# Altium PCB PWR MOD 1.0 B.PcbDoc
Units mm, origin at the board's own origin, x right, y up, seen from the top; angles counter-clockwise.
Board outline 72 x 31.25 mm, 2 copper layers (Top Layer, Bottom Layer), stack 1.621 mm thick; 47 components, 27 nets, 137 pads, 152 vias.
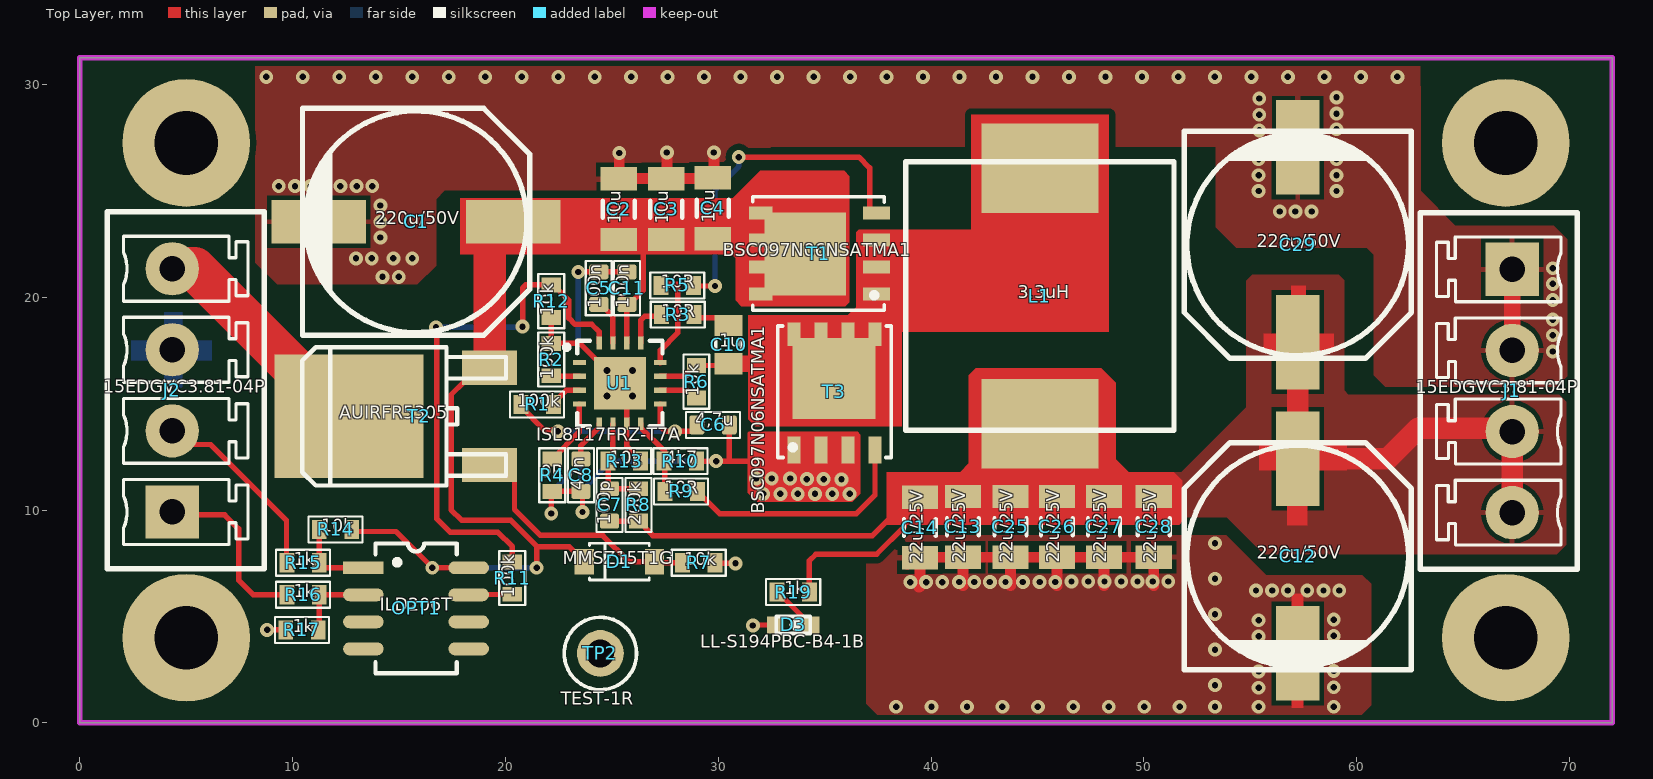
[diagram p0: Top Layer view]
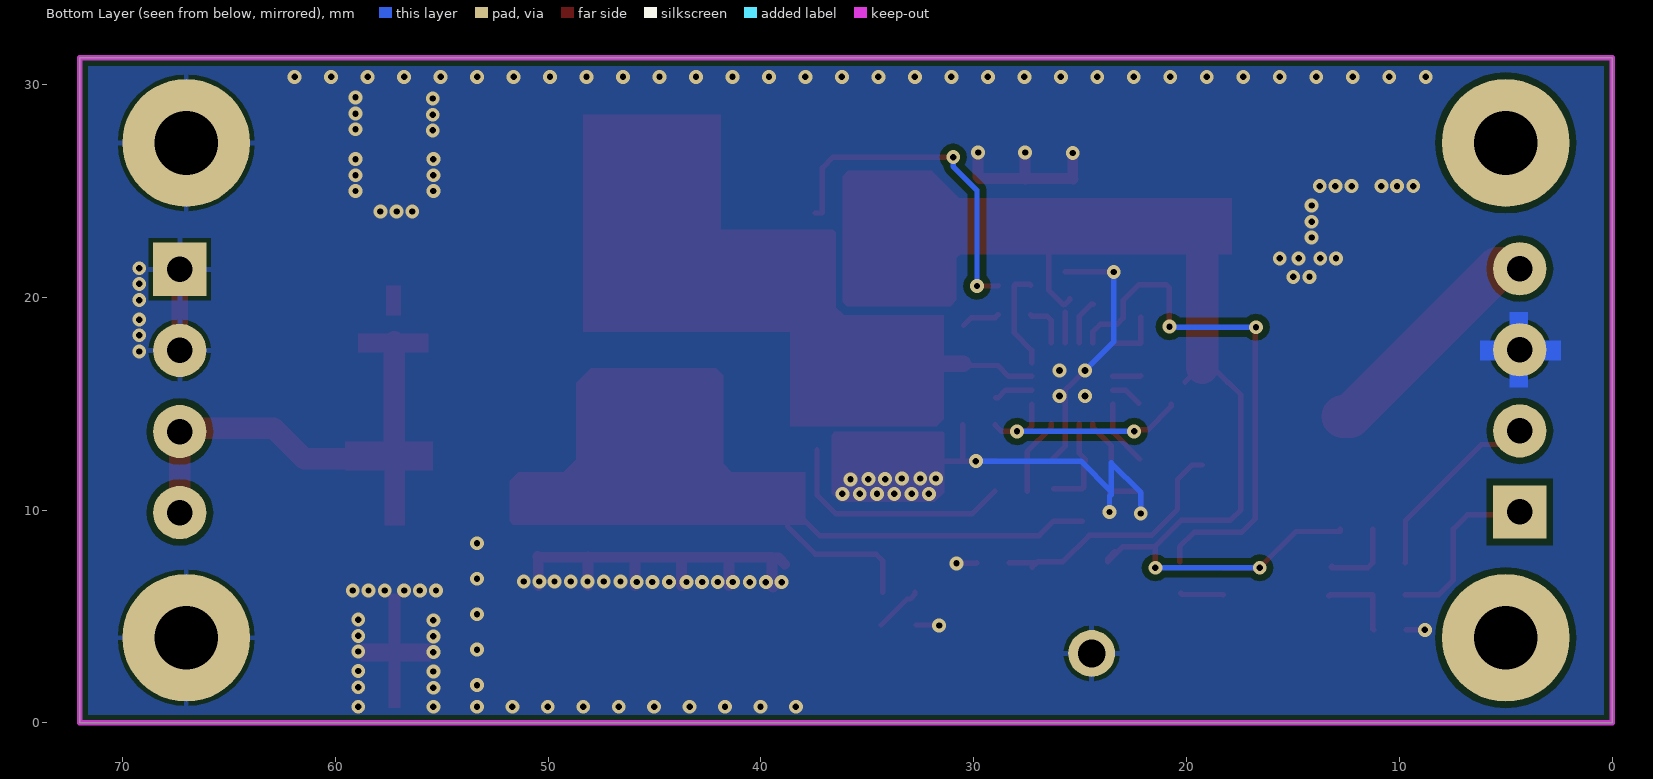
[diagram p1: Bottom Layer view, seen from below]
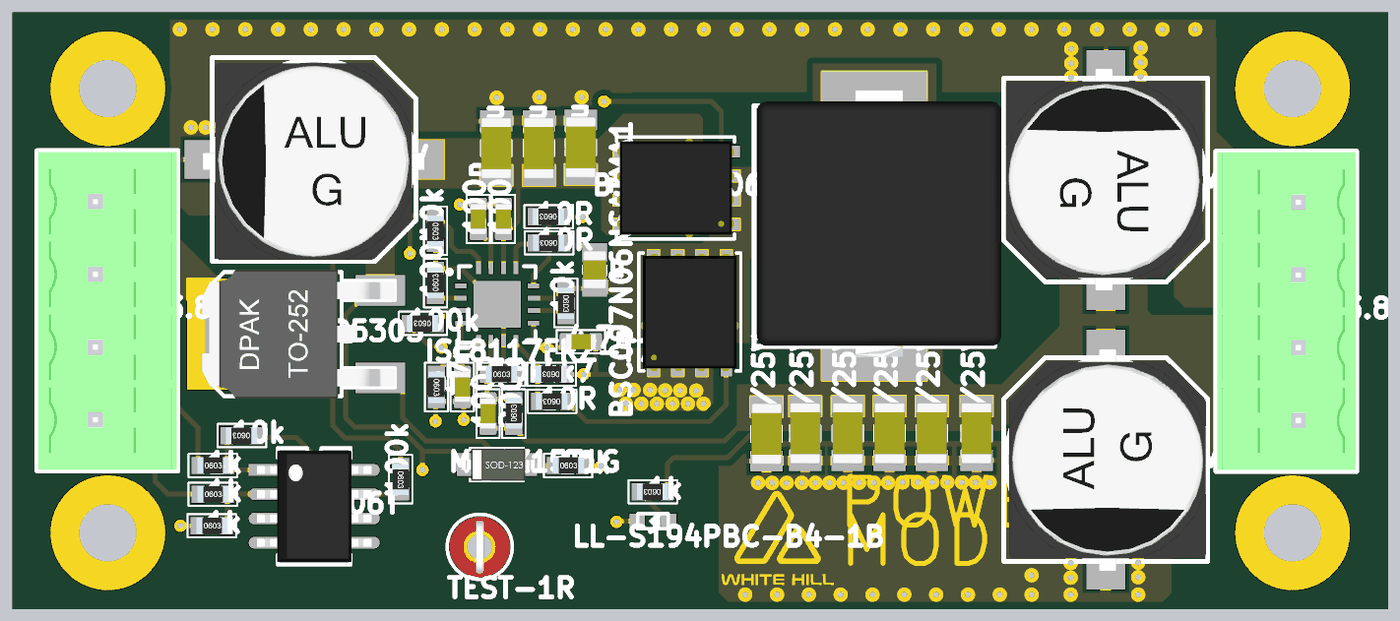
[diagram p2: 3D render of the assembled board from above, using the file's embedded part models]

## Layer stack, top to bottom
Top Solder: solder mask 0.0102, Solder Resist, Dk 3.5
Top Layer: signal copper 0.0356
Dielectric1: core 1.55, FR-4, Dk 4.2
Bottom Layer: signal copper 0.0356
Bottom Solder: solder mask 0.0102, Solder Resist, Dk 3.5

## Board outline
0,0 0,31.25 72,31.25 72,0

## Design rules (kind name [scope] priority, off if disabled: settings)
Clearance Clearance_1 [(OnLayer('Keep-Out Layer'))] p1: gap=0.254 ignorepadtopadclearanceinfootprint=FALSE except(0: Arc-Hole Track-Hole SMDPad-Hole THPad-Hole Via-Hole Fill-Hole Poly-Hole Region-Hole Text-Hole)
Clearance Track [istrack vs istrack] p2: gap=0.152 ignorepadtopadclearanceinfootprint=FALSE except(0: Arc-Hole Track-Hole SMDPad-Hole THPad-Hole Via-Hole Fill-Hole Poly-Hole Region-Hole Text-Hole)
Clearance poly [inpoly] p3: gap=0.305 ignorepadtopadclearanceinfootprint=FALSE
Clearance [All] p4: gap=0.178 ignorepadtopadclearanceinfootprint=FALSE except(0: Arc-Hole Track-Hole SMDPad-Hole THPad-Hole Via-Hole Fill-Hole Poly-Hole Region-Hole Text-Hole)
ComponentClearance ComponentClearance_2 [HasFootprint('CR123')] p1: gap=0 collisioncheckmode=3 verticalgap=0 showdistances=TRUE
ComponentClearance ComponentClearance_1 [HasFootprint('ANT1')] p2: gap=0 collisioncheckmode=3 verticalgap=0 showdistances=TRUE
ComponentClearance [All] p3: gap=0 collisioncheckmode=3 verticalgap=0 showdistances=FALSE
HoleSize [All] p1: absolutevalues=TRUE maxlimit=25.4 minlimit=0.254 maxpercent=80.000 minpercent=20.000
PolygonConnect CR123 [HasFootprint('CR123')] p1: connectstyle=Relief reliefconductorwidth=0.508 reliefentries=4 polygonreliefangle="90 Angle" airgapwidth=0.254
PolygonConnect coax [HasFootprint('COAXIAL-SWF')] p2: connectstyle=Direct reliefconductorwidth=0.254 reliefentries=4 polygonreliefangle="90 Angle" airgapwidth=0.254
PolygonConnect PolygonConnect_1 [isvia] p3: connectstyle=Direct reliefconductorwidth=0.254 reliefentries=4 polygonreliefangle="90 Angle" airgapwidth=0.254
PolygonConnect [All] p4: connectstyle=Relief reliefconductorwidth=0.254 reliefentries=4 polygonreliefangle="90 Angle" airgapwidth=0.203
RoutingVias [All] p1: holewidth=0.3 width=0.65 viastyle="Through Hole" minholewidth=0.3 minwidth=0.65 maxholewidth=0.3 maxwidth=0.65
SolderMaskExpansion SolderMaskExpansion_1 [isvia] p1: expansion=-2.54
SolderMaskExpansion [All] p2: expansion=0.051
Width [All] p1: maxlimit=5.08 minlimit=0.152 preferedwidth=0.254 minimp=50.000000 maximp=50.000000 favimp=50.000000
28 further rules are at their usual default settings.

## Components (designator, comment, footprint, x,y, rotation, side; value= is the part's Value field where it differs from the comment)
C1 "220u/50V" ALU-G 15.799,23.546 r270 top
C2 "10u" C1206 25.324,24.137 r90 top
C3 "10u" C1206 27.554,24.137 r90 top
C4 "10u" C1206 29.743,24.183 r90 top
C5 "100n" C0603 24.384,20.426 r90 top
C6 "4,7u" C0603 29.755,14 r0 top
C7 "100p" C0603 24.892,10.241 r270 top
C8 "47n" C0603 23.546,11.638 r270 top
C10 "1u" C0805-10 30.48,17.77 r270 top
C11 "100n" C0603 25.705,20.426 r270 top
C12 "220u/50V" ALU-G 57.226,7.836 r0 top
C13 "22u/25V" C1206 41.49,9.211 r270 top
C14 "22u/25V" C1206 39.472,9.18 r270 top
C25 "22u/25V" C1206 43.725,9.211 r270 top
C26 "22u/25V" C1206 45.91,9.211 r270 top
C27 "22u/25V" C1206 48.12,9.211 r270 top
C28 "22u/25V" C1206 50.456,9.211 r270 top
C29 "220u/50V" ALU-G 57.226,22.466 r180 top
D1 "MMSZ15T1G" SOD123 25.349,7.574 r0 top
D3 "LL-S194PBC-B4-1B" LED0603B 33.519,4.602 r180 top
J1 "15EDGVC3.81-04P" MCV1,5/4-G3,81 67.301,21.311 r0 top
J2 "15EDGVC3.81-04P" MCV1,5/4-G3,81 4.343,9.911 r180 top
L1 "3.3uH" HPI1260 45.11,20.056 r90 top
OPT1 "ILD206T" SO-8-OPT 15.799,5.385 r0 top
R1 "100k" R0603 21.487,14.965 r180 top
R2 "100k" R0603 22.149,17.073 r90 top
R3 "10R" R0603 28.092,19.181 r180 top
R4 "0R" R0603 22.2,11.638 r270 top
R5 "10R" R0603 28.071,20.553 r180 top
R6 "10k" R0603 28.968,16.032 r270 top
R7 "10k" R0603 29.083,7.523 r0 top
R8 "200k" R0603 26.245,10.241 r90 top
R9 "10R" R0603 28.252,10.876 r180 top
R10 "4k7" R0603 28.219,12.298 r180 top
R11 "100k" R0603 20.32,6.807 r270 top
R12 "10k" R0603 22.149,19.816 r270 top
R13 "10k" R0603 25.578,12.298 r0 top
R14 "10k" R0603 12.014,9.093 r180 top
R15 "1k" R0603 10.49,7.523 r0 top
R16 "1k" R0603 10.49,6.02 r0 top
R17 "1k" R0603 10.439,4.369 r0 top
R19 "1k" R0603 33.519,6.147 r180 top
T1 "BSC097N06NSATMA1" "PowerPAK SO-8" 34.722,22.052 r180 top
T2 "AUIRFR5305" DPAK 15.951,14.402 r180 top
T3 "BSC097N06NSATMA1" "PowerPAK SO-8" 35.458,15.549 r90 top
TP2 "TEST-1R" TP-O 24.46,3.264 r0 top
U1 "ISL8117FRZ-T7A" QFN-16-0.5 25.375,15.956 r0 top

## Footprints (in the part's own frame and the unit in brackets; to place one, negate y for a bottom-side part, rotate by r counter-clockwise, add the part's x,y. Pads: shape width x height; smd on the part's side, far side on the other; paste and mask are expansions set on the pad)
ALU-G [mil]
  rect 80x175 smd: 1(0,180) 2(0,-180)
  silkscreen extent -210,-210 210,210, body extent -199,-229 207,227, height 402
C0603 [mm] "Chip Capacitor, Body 1.6x0.8mm, IPC High Density"
  rrect30% 0.7x0.9 smd: 1(-0.762,0) 2(0.762,0)
  silkscreen extent -1.27,-0.61 1.27,0.61, body extent -0.8,-0.4 0.8,0.4, height 0.5
C0805-10 [mm]
  rect 1x1.3 smd: 1(-0.9,0) 2(0.9,0)
  silkscreen extent -0.2,-0.6 0.2,0.6, body extent -1,-0.63 1,0.63, height 1
C1206 [mm]
  rect 1.1x1.7 smd: 1(-1.425,0) 2(1.425,0)
  silkscreen extent -0.4,-0.75 0.4,0.75, body extent -1.6,-0.8 1.6,0.8, height 1
DPAK [mm]
  rect 2.6x1.6 smd: 1(-3.302,2.286) 3(-3.302,-2.286)
  rect 7x5.8 smd paste-3.048: 2(3.302,0)
  silkscreen extent -4.07,-3.25 5.5,3.25, body extent -4.08,-3.37 6.02,3.37, height 2.41
HPI1260 [mm] "SMT Power Inductor"
  rect 4.2x5.5 smd: 1(6,0) 2(-6,0)
  silkscreen extent -6.3,-6.3 6.3,6.3, body extent -6.87,-6.65 7.13,6.15, height 5.01
LED0603B [mm]
  rect 0.8x0.8 smd mask+0.051: A(-0.825,0) K(0.825,0)
  silkscreen extent -0.8,-0.4 0.8,0.4, body extent -0.8,-0.4 0.8,0.4, height 0.65
MCV1,5/4-G3,81 [mm]
  rect 2.5x2.5 hole 1.2: 1(0,0)
  round 2.5 hole 1.2: 2(0,-3.81) 3(0,-7.62) 4(0,-11.43)
  silkscreen extent -4.32,-14.1 3.05,2.67, body extent -4.25,-14.03 3,2.6, height 9.3
"PowerPAK SO-8" [mm]
  rect 3.81x3.91 smd: D(0.635,0.025)
  rect 1.1x0.61 smd: D(2.718,1.905) D(2.718,-0.635) D(2.718,0.635) D(2.718,-1.905)
  rect 1.27x0.61 smd: G(-2.718,-1.905) S(-2.718,1.905) S(-2.718,-0.635) S(-2.718,0.635)
  silkscreen extent -3.07,-2.67 3.1,2.67, body extent -3.07,-2.57 3.08,2.58, height 1.04
QFN-16-0.5 [mm] "QFN, 16-Leads, Body"
  rect 0.6x0.25 smd: 1(-1.9,0.975) 2(-1.9,0.325) 3(-1.9,-0.325) 4(-1.9,-0.975) 9(1.9,-0.975) 10(1.9,-0.325) 11(1.9,0.325) 12(1.9,0.975)
  rect 0.25x0.6 smd: 5(-0.975,-1.9) 6(-0.325,-1.9) 7(0.325,-1.9) 8(0.975,-1.9) 13(0.975,1.9) 14(0.325,1.9) 15(-0.325,1.9) 16(-0.975,1.9)
  rect 2.45x2.45 smd: 17(0,0)
  silkscreen extent -2.6,-2 2,2, body extent -2,-2 2,2, height 0.8
R0603 [mm] "Chip Resistor, Body 1.6x0.8mm, IPC High Density"
  rect 0.7x0.9 smd: 1(-0.762,0) 2(0.762,0)
  silkscreen extent -1.27,-0.61 1.27,0.61, body extent -0.8,-0.42 0.84,0.43, height 0.46
SO-8-OPT [mm]
  rect 1.905x0.61 smd: 1(-2.475,1.905)
  oval 1.905x0.61 smd: 2(-2.475,0.635) 3(-2.475,-0.635) 4(-2.475,-1.905) 5(2.475,-1.905) 6(2.475,-0.635) 7(2.475,0.635) 8(2.475,1.905)
  silkscreen extent -1.91,-3.05 1.91,3.05, body extent -3,-2.92 3,2.92, height 3.48
SOD123 [mm]
  rect 0.9x1.2 smd: 1(1.65,0) 2(-1.65,0)
  silkscreen extent -1.4,-0.86 1.4,0.86, body extent -1.85,-0.86 2,0.84, height 1.46
TP-O [mm]
  round 2.2 hole 1.3 paste-2.54: 1(0,0)
  silkscreen extent -1.7,-1.7 1.7,1.7, body extent -1.59,-1.59 1.59,1.59, height 8.13

## Part data
C1 C12 C29: library part CAP-EL, "Capacitor: electrolytic; low impedance; 220uF; 50VDC; Case: G", Manufacturer=Panasonic, Part Number=EEEFP1H221AP, ComponentLink1Description=Datasheet, ComponentLink1URL=D:\Datasheets\PANASONIC_FP.pdf, ComponentLink2Description=Dostawca, ComponentLink2URL=http://www.tme.eu/pl/katalog/?idp=1&search=EEEFP1H221AP, Supplier=TME, Supplier Code=EEEFP1H221AP
C2 C3 C4: library part C-028, "Capacitor: ceramic; 10uF; 50V; X7R; ±10%; SMD; 1206", Manufacturer=Samnsung, Part Number=CL31A106KBHNNNE, ComponentLink1Description=Datasheet, ComponentLink1URL=D:\Datasheets\.pdf, ComponentLink2Description=Dostawca, ComponentLink2URL=http://www.tme.eu/pl/katalog/?idp=1&search=CL31A106KBHNNNE, Indeks=C-0028, Supplier=TME, Supplier Code=CL31A106KBHNNNE
C5 C11: library part C-013, "Capacitor: ceramic; 100nF; 50V; X7R; ±10%; SMD; 0603; Series: GRM", Manufacturer=Murata, Part Number=GRM188R71H104KA93D, ComponentLink1Description=Datasheet, ComponentLink1URL=D:\Datasheets\.pdf, ComponentLink2Description=Dostawca, ComponentLink2URL=http://www.tme.eu/pl/katalog/?idp=1&search=GRM188R71H104KA93D, Indeks=C-0013, Supplier=TME, Supplier Code=GRM188R71H104KA93D
C6: library part C-031, "Capacitor: ceramic;4,7uF ; 50V; X7R; ±5%; SMD; 0603", Manufacturer=Samsung, Part Number=0603X475K100CT, ComponentLink1Description=Datasheet, ComponentLink1URL=D:\Datasheets\.pdf, ComponentLink2Description=Dostawca, ComponentLink2URL=https://www.tme.eu/pl/katalog/?search=0603X475K100CT, Indeks=C-031, Supplier=TME, Supplier Code=0603X475K100CT
C7: library part C-005, "Capacitor: ceramic; MLCC; 100pF; 50V; C0G; ±1%; SMD; 0603", Manufacturer=Vishay, Part Number=VJ0603A101FXACW1BC, ComponentLink1Description=Datasheet, ComponentLink1URL=D:\Datasheets\.pdf, ComponentLink2Description=Dostawca, ComponentLink2URL=http://www.tme.eu/pl/katalog/?idp=1&search=VJ0603A101FXACW1BC, Indeks=C-005, Supplier=TME, Supplier Code=VJ0603A101FXACW1BC
C8: library part C-012, "Capacitor: ceramic; MLCC; 47nF; 50V; X7R; ±10%; SMD; 0603", Manufacturer=Kemet, Part Number=C0603C473K5RACTU, ComponentLink1Description=Datasheet, ComponentLink1URL=D:\Datasheets\.pdf, ComponentLink2Description=Dostawca, ComponentLink2URL=http://www.tme.eu/pl/katalog/?idp=1&search=C0603C473K5RAC, Indeks=C-0012, Supplier=TME, Supplier Code=C0603C473K5RAC
C10: library part C-017, "Capacitor: ceramic; MLCC; 1uF; 50V; X7R; SMD; 0805", Manufacturer=Samsung, Part Number=CL21B105KBFNNNG, ComponentLink1Description=Datasheet, ComponentLink1URL=D:\Datasheets\.pdf, ComponentLink2Description=Dostawca, ComponentLink2URL=http://www.tme.eu/pl/katalog/?idp=1&search=CL21F105ZBFNNNE, Indeks=C-0017, Supplier=TME, Supplier Code=CL21B105KBFNNNG
C13 C14 C25 C26 C27 C28: library part C-029, "Capacitor: ceramic; 22uF; 25V; X7R; ±10%; SMD; 1206", Manufacturer=Murata, Part Number=GRM31CR61E226KE15L, ComponentLink1Description=Datasheet, ComponentLink1URL=D:\Datasheets\.pdf, ComponentLink2Description=Dostawca, ComponentLink2URL=http://www.tme.eu/pl/katalog/?idp=1&search=GRM31CR61E226KE15L, Indeks=C-0029, Supplier=TME, Supplier Code=GRM31CR61E226KE15L
D1: library part D_ZEN, "Dioda: Zenera; 0,5W; 18V; SMD", Manufacturer="ON Semi", ComponentLink1Description=Datasheet, ComponentLink1URL=D:\Datasheets\MMSZxxxT1G.pdf, ComponentLink2Description=Dostawca, ComponentLink2URL=http://www.tme.eu/pl/katalog/?idp=1&search=MMSZ15T1G, Part Number=MMSZ15T1G, Supplier=TME, Supplier Code=MMSZ15T1G
D3: library part LED_1, "LED; SMD; 0603; blue; 20-40mcd; 1.6x0.8x0.4mm; 130°; 2.8÷3.8V; 20mA", Manufacturer=LuckyLight, ComponentLink1Description=Datasheet, ComponentLink1URL=D:\Datasheets\.pdf, ComponentLink2Description=Dostawca, Part Number=LL-S194PBC-B4-1B, Supplier=TME, Supplier Code=LL-S194PBC-B4-1B
J1 J2: library part CON4, "Terminal block; 3.81mm; ways: 4; straight; socket; male", Manufacturer=Degson, Part Number=15EDGVC-3.81-04P-14-00A(H), ComponentLink1Description=Datasheet, ComponentLink1URL=D:\Datasheets\.pdf, ComponentLink2Description=Dostawca, Supplier=TME, Supplier Code=15EDGVC3.81-04P
L1: library part L_HPI_3.3uH, "Inductor: wire; SMD; 3.3uH; Ioper:14A; 2.45mOhm; ±20%; Isat:15A", Manufacturer=Ferrocore, Part Number=HPI1260-3R3, ComponentLink1Description=Datasheet, ComponentLink1URL=E:\Datasheets\HPI1260.pdf, ComponentLink2Description=Dostawca, ComponentLink2URL=http://www.tme.eu/pl/katalog/?idp=1&search=HPI1260-3R3, Indeks=IND, Supplier=TME, Supplier Code=HPI1260-3R3
OPT1: library part Opto_dual, "Transoptor; SMD; Kana³y:2; Wyj: tranzystorowe; Uizol:4kV; Uce:70V", Manufacturer=VISHAY, ComponentLink1Description=Datasheet, ComponentLink1URL=e:\Datasheets\ild205t.pdf, ComponentLink2Description=Dostawca, ComponentLink2URL=http://www.tme.eu/pl/katalog/?idp=1&search=ILD206T, Part Number=ILD206T, Supplier=TME, Supplier Code=ILD206T
R1 R2 R11: library part R-013, "Resistor: thick film; SMD; 0603; 100k; 0.125W; ±5%", Manufacturer=Walsin, Part Number=WF06P104JTL, Tolerance=5%, ComponentLink1Description=Datasheet, ComponentLink1URL=D:\Datasheets\.pdf, ComponentLink2Description=Dostawca, ComponentLink2URL=http://www.tme.eu/pl/katalog/?idp=1&search=WF06P-100K-5%, Indeks=R-011, Supplier=TME, Supplier Code=WF06P-100K-5%
R3 R5 R9: library part R-001, "Resistor: thick film; SMD; 0603; 10R; 0.1W; ±5%", Manufacturer="Royal Ohm", Part Number=0603SAJ0100T5E, Tolerance=5%, ComponentLink1Description=Datasheet, ComponentLink1URL=D:\Datasheets\.pdf, ComponentLink2Description=Dostawca, ComponentLink2URL=http://www.tme.eu/pl/katalog/?idp=1&search=SMD0603-10R, Indeks=R-001, Supplier=TME, Supplier Code=SMD0603-10R
R4: library part R-018, "Resistor: thick film; SMD; 0603; 0R; 0.125W; ±5%", Manufacturer="Royal Ohm", Part Number=CRCW06030000Z0TABC, Tolerance=1%, ComponentLink1Description=Datasheet, ComponentLink1URL=D:\Datasheets\.pdf, ComponentLink2Description=Dostawca, ComponentLink2URL=http://www.tme.eu/pl/katalog/?idp=1&search=CRCW06030000Z0TABC, Indeks=R-018, Supplier=TME, Supplier Code=CRCW06030000Z0TABC
R6 R7 R12 R13 R14: library part R-012, "Resistor: thick film; SMD; 0603; 10k; 0.125W; ±5%", Manufacturer=Walsin, Part Number=WF06P103JTL, Tolerance=5%, ComponentLink1Description=Datasheet, ComponentLink1URL=D:\Datasheets\.pdf, ComponentLink2Description=Dostawca, ComponentLink2URL=http://www.tme.eu/pl/katalog/?idp=1&search=WF06P-10K-5%, Indeks=R-011, Supplier=TME, Supplier Code=WF06P-10K-5%
R8: library part R-042, "Resistor: thick film; SMD; 0805; 200k; 0.125W; ±5%;", Manufacturer="Royal Ohm", Part Number=0603SAJ0204T5E, Tolerance=5%, ComponentLink1Description=Datasheet, ComponentLink1URL=D:\Datasheets\.pdf, ComponentLink2Description=Dostawca, ComponentLink2URL=http://www.tme.eu/pl/katalog/?idp=1&search=CS05JTGVR220, Indeks=R-042, Supplier=TME, Supplier Code=SMD0603-200K
R10: library part R-011, "Resistor: thick film; SMD; 0603; 4.7k; 0.125W; ±5%", Manufacturer=Walsin, Part Number=WF06P472JTL, Tolerance=5%, ComponentLink1Description=Datasheet, ComponentLink1URL=D:\Datasheets\.pdf, ComponentLink2Description=Dostawca, ComponentLink2URL=http://www.tme.eu/pl/katalog/?idp=1&search=WF06P-4K7-5%, Indeks=R-011, Supplier=TME, Supplier Code=WF06P-4K7-5%
R15 R16 R17 R19: library part R-005, "Resistor: thick film; SMD; 0603; 1k; 0.1W; ±5%", Manufacturer="Royal Ohm", Part Number=0603SAJ0102T5E, Tolerance=5%, ComponentLink1Description=Datasheet, ComponentLink1URL=D:\Datasheets\.pdf, ComponentLink2Description=Dostawca, ComponentLink2URL=http://www.tme.eu/pl/katalog/?idp=1&search=SMD0603-1K, Indeks=R-004, Supplier=TME, Supplier Code=SMD0603-1K
T1 T3: library part NVMFS5C426NAFT1G, "Transistor N MOS 60V;10 mOhm;46A", Manufacturer=Infineon, ComponentLink1Description=Datasheet, ComponentLink1URL=E:\Datasheets\NVMFS5C426NAFT1G.pdf, ComponentLink2Description=Dostawca, ComponentLink2URL=https://pl.mouser.com/ProductDetail/ON-Semiconductor/NVMFS5C426NAFT1G?qs=%2fha2pyFadugLwIkhTqkZTOZfrb%252b8fUFxyykPvHBDJB%2fODM3St1Y24x7PSds6Ow9j, Indeks=TRAN, Part Number=BSC097N06NSATMA1, Supplier=TME, Supplier Code=BSC097N06NSATMA1
T2: library part IRFR5410PBF, "Transistor: P-MOSFET; unipolar; -55V; -31A; 110W; DPAK", Manufacturer=IR, ComponentLink1Description=Datasheet, ComponentLink1URL=D:\Datasheets\IPD042P03L3GBTMA1.pdf, ComponentLink2Description=Dostawca, ComponentLink2URL=http://www.tme.eu/pl/katalog/?idp=1&search=IPD042P03L3GBTMA1, Indeks=TRAN, Part Number=AUIRFR5305, Supplier=TME, Supplier Code=AUIRFR5305
TP2: library part TP_O, "Sprezynka pomiarowa czerwona", ComponentLink1Description=Datasheet, ComponentLink1URL=D:\Datasheets\.pdf, ComponentLink2Description=Dostawca, Part Number=TEST-1R, Supplier=TME, Supplier Code=TEST-1R
U1: library part ISL8117, "Synchronous Step-Down PWM Controller 60V 2MHz", Manufacturer=Renesas, ComponentLink1Description=Datasheet, ComponentLink1URL=E:\Datasheets\isl8117.pdf, ComponentLink2Description=Dostawca, ComponentLink2URL=https://pl.farnell.com/search?st=ISL8117FRZ, Part Number=ISL8117FRZ-T7A, Supplier=Farnell, Supplier Code=2543368, Uwagi="Z literka A zewnêtrnz komp. unikaæ"

## Free pads (board coordinates)
  round 6 hole 3: 0(5,4) 0(5,27.25) 0(67,27.25) 0(67,4)

## Via types
v1: diameter 0.65, hole 0.3, Top Layer to Bottom Layer, 148 vias
v2: diameter 0.66, hole 0.33, Top Layer to Bottom Layer, tented top, 4 vias

## Nets (pads, with @x,y where several pads share a name; then routed paths per layer and width w, separated by ;. In a path a pad name is that pad's centre, name@x,y a point inside that pad or via, vN(x,y) a via of type N, cw(c..) or ccw(c..) an arc to the next point about the centre after c; other vN are vias at no path point)
+12V6: C7.2 C12.1 C13.1 C14.1 C25.1 C26.1 C27.1 C28.1 C29.1 J1.3 J1.4 L1.2 R8.1 R19.1 | length 55.7
  Top Layer w0.254: C7.2 R8.1 26.922,8.802 37.245,8.802 39.048,10.605 C14.1@39.172,10.605 ; R19.1 34.281,7.62 34.586,7.925 37.443,7.925 38.749,9.231 38.749,10.182 C14.1@39.172,10.605 ; C14.1 C14.1@39.172,10.605
  Top Layer w0.508: C13.1 C25.1 C26.1 C27.1 48.099,10.657 42.862,10.657
  Top Layer w1.016: C29.1 C12.1 61.446,12.408 62.881,13.843 67.149,13.843 J1.3 J1.4
+VBAT: J2.4 T2.2 | length 11.2
  Top Layer w2.032: J2.4@4.394,21.412 4.47,21.336 5.389,21.336 12.323,14.402 T2.2
EN_A: J2.2 R15.1 | length 9.2
  Top Layer w0.254: J2.2@4.42,13.716 4.343,13.64 4.47,13.64 5.029,13.081 6.147,13.081 9.71,9.517 9.71,7.541 R15.1
EN_K: J2.1 R16.1 | length 7.9
  Top Layer w0.254: J2.1@4.826,9.779 6.807,9.779 7.468,9.119 7.468,6.706 8.153,6.02 R16.1
GND: C1.2 C2.2 C3.2 C4.2 C5.2 C6.2 C8.2 C11.1 C12.2 C13.2 C14.2 C25.2 C26.2 C27.2 C28.2 C29.2 D3.K J1.1 J1.2 J2.3 pad.0@67,4 pad.0@67,27.25 R2.2 R4.2 R7.2 R10.1 R12.2 R13.2 R17.1 T3.S TP2.1 U1.7 U1.17 | length 72.9
  Top Layer w0.254: v1(8.801,4.369) R17.1 ; v1(22.149,9.837) 22.149,10.821 22.147,10.823 R4.2 C8.2 23.622,10.8 v1(23.622,9.911) ; R12.2 R2.2 23.495,17.835 v2(24.775,16.556) U1.17 25.7,15.631 U1.7 25.7,12.987 26.289,12.398 R13.2@26.289,12.298 ; v1(23.419,21.188) C5.2 C11.1 ; R10.1 v1(29.896,12.298) 30.517,12.298 ; R7.2 29.87,7.497 v1(30.81,7.497) ; C6.2 30.517,12.298 ; v1(31.623,4.576) 31.648,4.602 D3.K ; 33.096,12.349 32.969,12.349 32.918,12.298 30.517,12.298
  Top Layer w0.508: C2.2 C2.2@25.347,25.585 ; v1(25.347,26.776) C2.2@25.347,25.585 ; C3.2 C3.2@27.577,25.585 ; v1(27.584,26.801) 27.584,25.593 C3.2@27.577,25.585 ; v1(29.794,26.801) 29.794,25.658 C4.2 29.721,25.585 C3.2@27.577,25.585 ; C14.2@38.876,7.459 39.172,7.755 C14.2 ; 39.437,6.375 39.472,6.41 C14.2 ; v1@41.49,6.441 C13.2 ; v1@43.725,6.441 C25.2 ; v1@45.91,6.441 C26.2 ; v1@48.12,6.453 C27.2@48.12,7.798 ; v1@50.456,6.441 C28.2 ; C28.2@50.482,7.812 C28.2 ; C2.2@25.347,25.585 C3.2@27.577,25.585 ; C14.2 39.503,7.786 C13.2 ; C13.2 C25.2 ; C25.2 C26.2 ; C26.2 C27.2 C28.2
  Top Layer w0.762: J1.2 J1.1
  Bottom Layer w0.254: v1(22.149,9.837) 22.149,10.821 23.546,12.219 23.546,10.876 ; v1(23.419,21.188) 23.419,17.911 v2(24.775,16.556) ; v1(23.622,9.911) 23.622,10.654 23.546,10.729 23.546,10.876 ; v1(29.896,12.298) 24.968,12.298 23.546,10.876
  other v1: 38.354,0.762 40.019,0.762 41.684,0.762 43.349,0.762 45.014,0.762 46.68,0.762 48.345,0.762 50.01,0.762 51.675,0.762 53.34,0.762 55.388,0.762 58.919,0.762 55.388,1.651 58.919,1.676 53.34,1.778 55.388,2.413 58.919,2.438 55.388,3.327 58.919,3.353 53.34,3.443 55.388,4.064 58.919,4.089 55.388,4.826 58.919,4.851 53.34,5.108 55.261,6.223 56.023,6.223 56.76,6.223 57.674,6.223 58.436,6.223 59.173,6.223 39.026,6.614 39.763,6.614 40.525,6.614 41.312,6.618 42.024,6.618 42.76,6.618 43.497,6.618 44.31,6.618 45.097,6.618 45.834,6.618 46.596,6.643 47.383,6.643 48.145,6.643 48.932,6.643 49.694,6.643 50.406,6.643 51.142,6.643 53.34,6.773 53.34,8.438 32.106,10.76 32.918,10.76 33.731,10.76 34.544,10.76 35.357,10.76 36.17,10.76 35.789,11.443 34.163,11.455 34.95,11.455 31.775,11.481 32.512,11.481 33.376,11.481 69.206,17.45 69.206,18.212 69.206,18.948 69.206,19.863 69.206,20.625 14.224,20.955 14.986,20.955 69.206,21.361 12.979,21.823 13.716,21.823 14.732,21.823 15.621,21.823 14.122,22.809 14.122,23.546 56.379,24.028 57.116,24.028 57.878,24.028 14.122,24.308 55.388,24.994 59.046,24.994 9.347,25.222 10.109,25.222 10.846,25.222 12.243,25.222 13.005,25.222 13.741,25.222 55.388,25.73 59.046,25.73 55.388,26.492 59.046,26.492 55.414,27.838 59.046,27.889 55.414,28.575 59.046,28.626 55.414,29.337 59.046,29.388 8.763,30.353 10.477,30.353 12.192,30.353 13.906,30.353 15.62,30.353 17.334,30.353 19.049,30.353 20.763,30.353 22.477,30.353 24.191,30.353 25.906,30.353 27.62,30.353 29.334,30.353 31.049,30.353 32.763,30.353 34.477,30.353 36.191,30.353 37.906,30.353 39.62,30.353 41.334,30.353 43.048,30.353 44.763,30.353 46.477,30.353 48.191,30.353 49.906,30.353 51.62,30.353 53.334,30.353 55.048,30.353 56.763,30.353 58.477,30.353 60.191,30.353 61.905,30.353
  other v2: 24.775,15.356 25.975,15.356 25.975,16.556
NetC5_1: C5.1 U1.15 | length 2.1
  Top Layer w0.254: C5.1 24.484,19.664 25.05,19.098 U1.15
NetC7_1: C7.1 R8.2 R13.1 U1.6 | length 4.7
  Top Layer w0.254: R13.1@24.765,12.298 R13.1@24.765,12.398 ; U1.6 25.05,12.683 R13.1@24.765,12.398 ; R8.2 C7.1 24.828,11.066 24.828,12.334 R13.1@24.765,12.398
NetC8_1: C8.1 U1.5 | length 2
  Top Layer w0.254: C8.1@23.546,12.391 C8.1 23.546,13.031 24.4,13.885 U1.5
NetC10_1: C10.1 R3.1 | length 1.8
  Top Layer w0.254: R3.1 28.993,19.043 30.107,19.043 C10.1
NetC10_2: C10.2 L1.1 R6.1 T1.S T3.D U1.11 | length 13.1
  Top Layer w0.254: U1.11 28.355,16.281 28.868,16.794 R6.1 30.404,16.794 C10.2 ; T3.D@37.363,18.267 37.363,22.61 T1.S@37.44,22.687
  Top Layer w0.762: C10.2 34.747,16.87 T3.D@35.433,16.184
NetD1_1: D1.1 R7.1 T2.1 | length 12.1
  Top Layer w0.254: T2.1 19.753,12.116 20.426,11.443 20.426,10.028 21.643,8.811 24.569,8.811 25.806,7.574 D1.1 D1.1@27.05,7.523 ; D1.1@27.253,7.32 D1.1@27.05,7.523 ; R7.1 D1.1@27.05,7.523
NetD3_A: D3.A R19.2 | length 2.3
  Top Layer w0.254: R19.2 32.757,6.047 32.98,5.824 33.122,5.824 D3.A
NetOPT1_1: OPT1.1 R14.2 R15.2 | length 3.7
  Top Layer w0.254: R14.2 R15.2 11.252,7.513 11.475,7.29 13.183,7.29 13.208,7.315 OPT1.1@13.157,7.366
NetOPT1_2: OPT1.2 R16.2 R17.2 | length 3.8
  Top Layer w0.254: R17.2 11.252,4.42 R16.2 13.259,6.02 OPT1.2@13.31,5.969
NetOPT1_7: OPT1.7 R11.2 | length 2
  Top Layer w0.254: OPT1.7 18.287,6.032 20.206,6.032 R11.2@20.269,6.096
NetR1_1: R1.1 U1.3 | length 1.5
  Top Layer w0.254: R1.1@22.236,15.013 22.851,15.629 23.473,15.629 U1.3
NetR2_1: R2.1 U1.2 | length 1.3
  Top Layer w0.254: R2.1 22.177,16.283 23.473,16.283 U1.2
NetR3_2: R3.2 U1.13 | length 2.1
  Top Layer w0.254: U1.13 26.35,18.912 26.543,19.105 27.254,19.105 R3.2
NetR4_1: R4.1 U1.4 | length 3.1
  Top Layer w0.254: R4.1 23.458,13.658 23.458,14.979 23.46,14.981 U1.4
NetR5_1: R5.1 T1.G | length 16.3
  Top Layer w0.254: R5.1 28.859,20.528 v1(29.845,20.528) ; v1(30.963,26.581) 36.605,26.581 37.11,26.077 37.11,23.957 T1.G
  Bottom Layer w0.254: v1(29.845,20.528) 29.845,25.023 30.963,26.141 v1(30.963,26.581)
NetR5_2: R5.2 U1.12 | length 4.8
  Top Layer w0.254: U1.12 27.275,17.507 28.092,18.324 28.092,20.552 28.04,20.604 27.36,20.604 R5.2
NetR6_2: R6.2 U1.10 | length 1.8
  Top Layer w0.254: U1.10 28.508,15.631 28.868,15.27 R6.2
NetR9_1: R9.1 T3.G | length 11.3
  Top Layer w0.254: R9.1 30.06,9.83 36.495,9.83 37.363,10.698 T3.G
NetR9_2: R9.2 R10.2 U1.8 | length 3.7
  Top Layer w0.254: U1.8 26.35,13.885 27.49,12.744 R9.2
NetR11_1: R11.1 R12.1 U1.16 | length 25.3
  Top Layer w0.254: v1(16.739,18.593) 16.764,18.567 16.764,9.601 17.399,8.966 19.634,8.966 20.32,8.28 R11.1 ; v1(20.803,18.618) 20.803,20.43 20.951,20.578 R12.1 22.249,20.578 22.975,19.853 22.975,19.016 23.266,18.724 24.054,18.724 24.398,18.38 24.398,17.858 U1.16
  Bottom Layer w0.254: v1(16.739,18.593) 20.777,18.593 v1(20.803,18.618)
VBAT: C1.1 C2.1 C3.1 C4.1 C11.2 D1.2 OPT1.8 R14.1 T1.D T2.3 U1.14 | length 58.1
  Top Layer w0.254: R14.1 12.776,8.993 14.857,8.993 v1(16.561,7.29) OPT1.8 ; T2.3@20.07,16.015 19.397,16.688 T2.3 18.753,16.688 18.08,16.015 18.047,16.015 17.45,15.418 17.45,10.008 17.932,9.525 20.244,9.525 21.488,8.28 ; v1(21.463,7.29) 21.463,8.255 21.488,8.28 ; D1.2@23.376,8.047 23.699,7.724 D1.2 22.992,8.28 21.488,8.28 ; C2.1@24.901,23.135 C2.1 26.467,22.712 26.467,20.326 C11.2@25.779,19.639 ; C11.2@25.494,19.938 25.494,19.874 C11.2 ; U1.14 25.7,19.287
  Top Layer w1.016: C1.1 24.19,23.546 25.024,22.712 C2.1 25.347,22.735 C3.1@27.554,22.735 ; C3.1 C3.1@27.554,22.735 ; T1.D@32.004,22.687 T1.D@32.004,22.758 ; T1.D@34.087,22.026 33.355,22.758 T1.D@32.004,22.758 ; C3.1@27.554,22.735 29.721,22.735 C4.1 T1.D@32.004,22.758
  Top Layer w1.524: T2.3 19.253,23.292 19.507,23.546 C1.1
  Bottom Layer w0.254: v1(16.561,7.29) v1(21.463,7.29)
VCC5: C6.1 R1.2 U1.9 | length 10.8
  Top Layer w0.254: R1.2 20.725,14.865 21.819,13.771 22.388,13.771 v1(22.464,13.695) ; U1.9 27.275,13.933 27.513,13.695 v1(27.965,13.695) 28.689,13.695 C6.1
  Bottom Layer w0.254: v1(22.464,13.695) v1(27.965,13.695)
pads on no net: OPT1.3 OPT1.4 OPT1.5 OPT1.6 U1.1

## Polygon pours and split planes (outlines as drawn)
GND on Bottom Layer "Bottom Layer-GND" (solid, pour order 4): 0,31.25 72,31.25 72,0 0,0
GND on Top Layer "Top Layer-GND 2" (solid, pour order 20): 15.854,20.604 16.739,21.488 16.739,24.613 17.145,25.019 30.429,25.019 32.487,27.076 62.992,27.076 62.992,31.217 8.288,31.217 8.255,31.25 8.255,21.615 9.267,20.604 9.428,20.604
GND on Top Layer "Top Layer-GND" (solid, pour order 16): 36.957,7.807 37.964,8.814 53.873,8.814 55.753,6.934 60.265,6.934 60.672,6.528 60.672,0.838 60.087,0.254 37.592,0.254 36.957,0.889
GND on Top Layer "Top Layer-GND 1" (solid, pour order 14): 60.799,21.996 60.468,22.327 54.347,22.327 53.382,23.292 53.382,30.048 53.814,30.48 62.45,30.48 63.008,29.921 63.008,24.994 64.634,23.368 69.257,23.368 69.892,22.733 69.892,16.278 69.413,15.799 61.332,15.799 60.799,16.332
+12V6 on Top Layer "Top Layer-+12V6" (solid, pour order 12): 49.292,11.786 51.756,11.786 54.804,14.834 54.804,20.777 55.084,21.057 59.148,21.057 59.402,20.803 59.402,15.621 59.605,15.418 69.511,15.418 69.841,15.088 69.841,8.382 69.384,7.925 55.617,7.925 53.89,9.652 49.292,9.652

## Keep-outs
Keep-Out Layer:
  the board outline again, w0.254

## Other copper
Top Layer:
  rectangle net GND: 55.49,2.896 58.817,3.734
  rectangle net GND: 56.938,0.711 57.497,6.071
  rectangle net +12V6: 56.709,9.271 57.674,11.862
  rectangle net +12V6: 55.414,11.862 59.529,13.233
  rectangle net +12V6: 56.912,19.152 57.624,20.547
  rectangle net +12V6: 55.617,17.399 58.919,18.288
  region net +12V6: 37.922,9.754 37.922,10.372 37.922,11.786 41.368,11.786 41.774,12.192 41.774,16.341 42.095,16.662 47.997,16.662 48.683,15.977 48.683,12.395 49.292,11.786 51.401,11.786 51.807,11.379 51.807,9.474 51.655,9.322 37.922,9.322
  region net VBAT: 17.882,24.642 30.688,24.642 31.979,25.933 35.907,25.933 36.144,25.696 36.144,19.766 35.966,19.588 31.09,19.588 30.81,19.867 30.81,21.823 30.607,22.026 17.882,22.026
  region net GND: 31.394,13.644 31.42,13.67 36.544,13.67 36.671,13.543 36.671,10.76 36.3,10.389 31.83,10.389 31.394,10.824
  region net NetC10_2: 31.407,19.156 36.093,19.156 36.474,19.537 36.474,23.048 36.594,23.168 41.885,23.168 41.885,28.575 48.353,28.575 48.353,18.38 38.608,18.38 38.608,13.949 31.725,13.949 31.407,14.267
Bottom Layer:
  rectangle net GND: 3.964,15.748 4.826,19.304
  rectangle net GND: 2.413,17.018 6.223,17.976

## Silkscreen, mask and mechanical layers (free items; w line width, h text height)
Top Solder:
  drawing of 11 lines, arcs and shapes, not listed
  text "POWER" at 43.048,4.394 h2.54
  text "MOD" at 43.098,2.39 h2.54
Bottom Solder:
  text "+PWR" at 12.7,20.447 h2.54
  text "GND" at 65.278,20.447 h2.54
  text "GND" at 11.947,16.637 h2.54
  text "GND" at 65.278,16.637 h2.54
  text "EN A" at 11.947,12.827 h2.54
  text "VOUT" at 65.278,12.827 h2.54
  text "EN K" at 11.947,9.017 h2.54
  text "VOUT" at 65.278,9.017 h2.54
Mechanical 1:
  the board outline again, w0.254

## Dimensions
0,31.25 to 0,0 on Mechanical 2
0,0 to 72,0 on Mechanical 2